# Altium PCB DRV8874.PcbDoc
Units mil, origin at the board's own origin, x right, y up, seen from the top; angles counter-clockwise.
Board outline 1080 x 1230 mil, 2 copper layers (Top Layer, Bottom Layer); 12 components, 14 nets, 39 pads, 0 vias.
Unrouted connection lines stored in the file: 5.
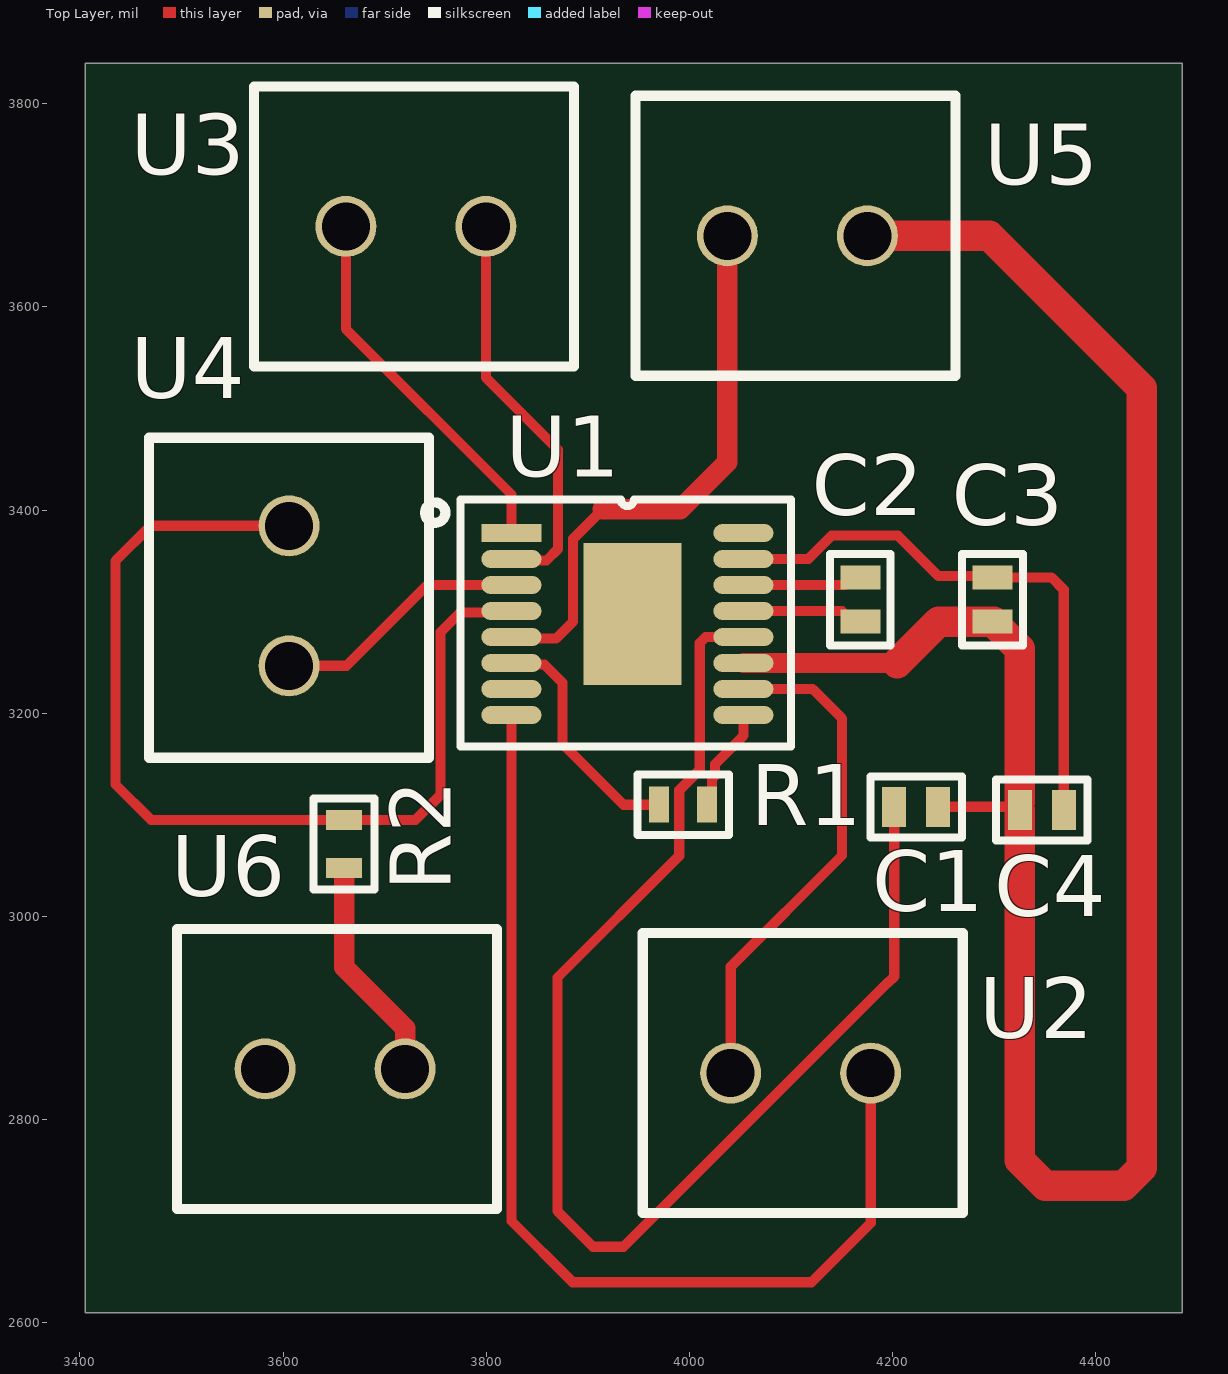
[diagram p0: Top Layer view]
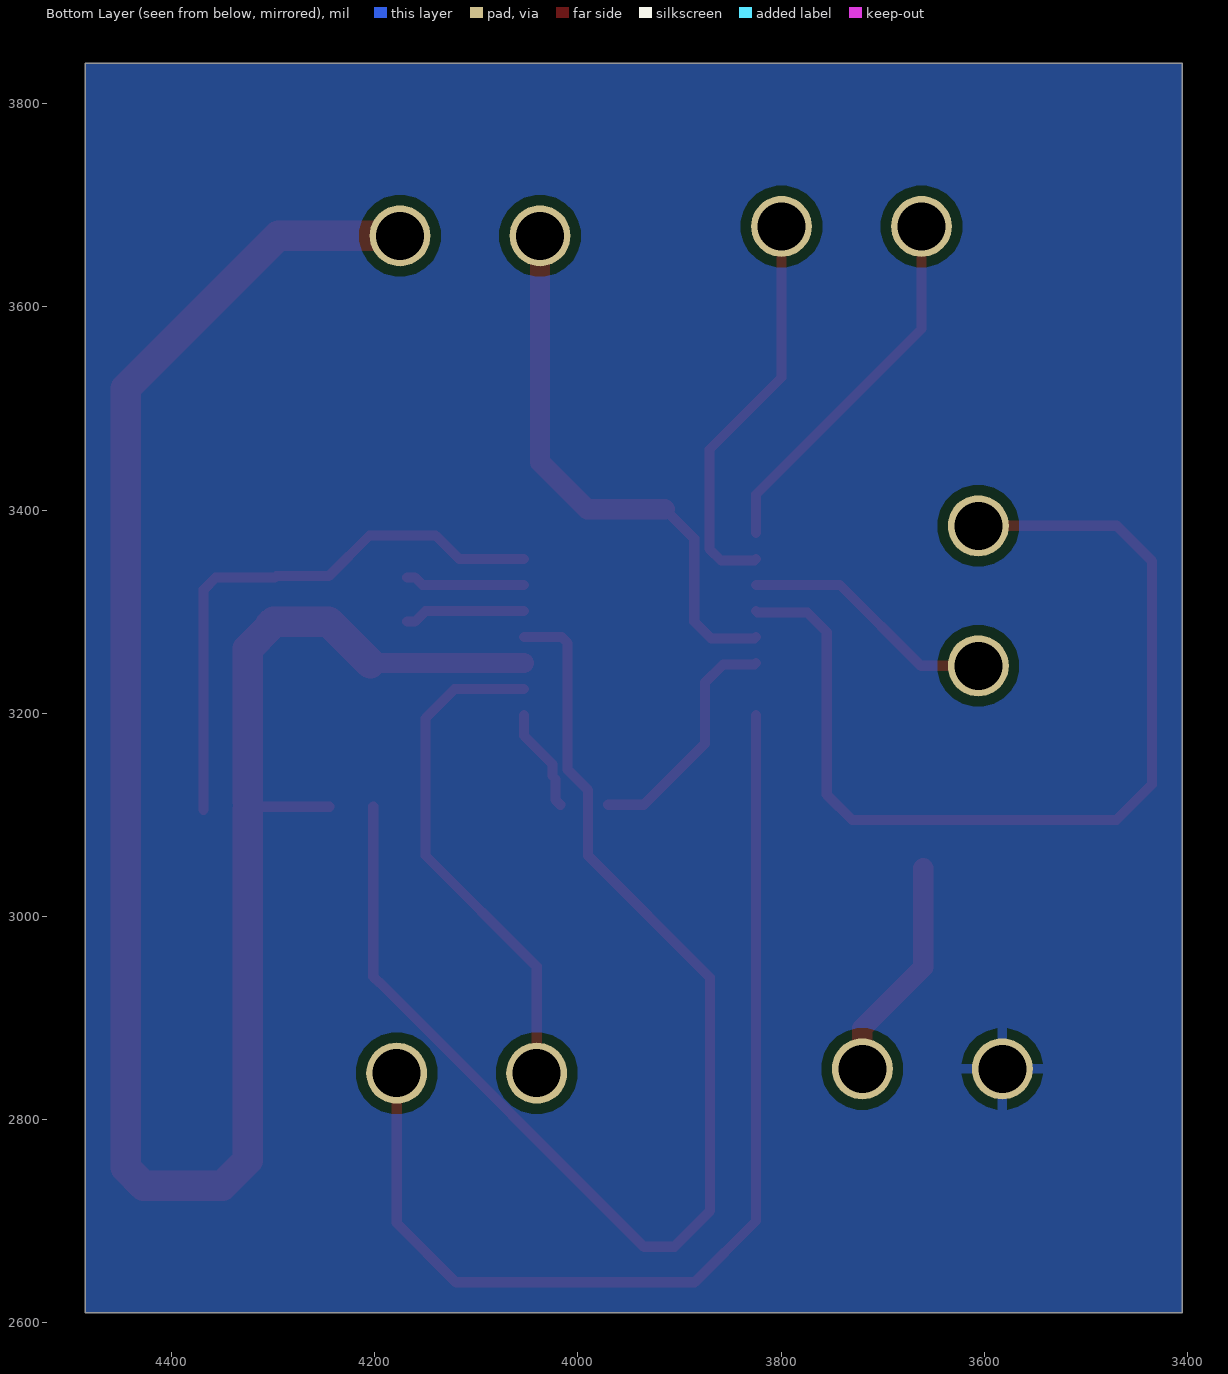
[diagram p1: Bottom Layer view, seen from below]

## Layer stack, top to bottom
Top Solder: solder mask 0.4, Solder Resist, Dk 3.5
Top Layer: signal copper 1.4
Dielectric 1: dielectric 12.6, FR-4, Dk 4.8
Bottom Layer: signal copper 1.4
Bottom Solder: solder mask 0.4, Solder Resist, Dk 3.5

## Board outline
3405,2610 4485,2610 4485,3840 3405,3840

## Design rules (kind name [scope] priority, off if disabled: settings)
Clearance [All] p1: gap=10 ignorepadtopadclearanceinfootprint=FALSE except(0: Arc-Hole Track-Hole SMDPad-Hole THPad-Hole Via-Hole Fill-Hole Poly-Hole Region-Hole Text-Hole; 5: Arc-Arc Arc-Track Arc-SMDPad Arc-THPad Arc-Via Track-Track Track-SMDPad Track-THPad Track-Via SMDPad-SMDPad SMDPad-THPad SMDPad-Via THPad-THPad THPad-Via Via-Via)
PolygonConnect [All] p1: connectstyle=Relief reliefconductorwidth=10 reliefentries=4 polygonreliefangle="90 Angle" airgapwidth=10
RoutingVias [All] p1: holewidth=28 width=50 viastyle="Through Hole" minholewidth=28 minwidth=50 maxholewidth=28 maxwidth=50
SolderMaskExpansion [All] p1: expansion=4 istentingtop=FALSE
Width Width_1 [All] p1: maxlimit=99999 minlimit=10 preferedwidth=10 minimp=50.000000 maximp=50.000000 favimp=50.000000
Width [All] p2: maxlimit=30 minlimit=5 preferedwidth=10 minimp=50.000000 maximp=50.000000 favimp=50.000000
30 further rules are at their usual default settings.

## Components (designator, comment, footprint, x,y, rotation, side; value= is the part's Value field where it differs from the comment)
C1 "Capacitor_100nF_0603" Capacitor_0603 4225,3105 r180 top
C2 "Capacitor_22nF_0603" Capacitor_0603 4165,3310 r90 top
C3 "Capacitor_100nF_0603" Capacitor_0603 4295,3310 r90 top
C4 "Capacitor_100nF_0603" Capacitor_0603 4348.62,3102.01 r180 top
R1 "Res_560m_0603" Res_10K_0603 3990.2,3103.86 r0 top
R2 "Res_10K_0603" Res_10K_0603 3666.14,3067.95 r90 top
U1 "DRV8874" DRV8874 3940,3290 r0 top
U2 "Terminal_Block" Terminal_Block 4110,2840 r0 top
U3 "Terminal_Block" Terminal_Block 3730,3685 r180 top
U4 "Terminal_Block" Terminal_Block 3600,3315 r270 top
U5 "Terminal_Block" Terminal_Block 4105.47,3675.83 r180 top
U6 "Terminal_Block" Terminal_Block 3651.73,2844.17 r0 top

## Footprints (in the part's own frame and the unit in brackets; to place one, negate y for a bottom-side part, rotate by r counter-clockwise, add the part's x,y. Pads: shape width x height; smd on the part's side, far side on the other; paste and mask are expansions set on the pad)
Capacitor_0603 [mm]
  rect 0.6x1 smd: 1(-0.5,-0.076) 2(0.6,-0.076)
  silkscreen extent -1.09,-0.84 1.19,0.69, body extent -0.71,-0.46 0.89,0.34, height 0.8
DRV8874 [mm]
  rect 1.5x0.45 smd mask+0.102: 1(-2.93,2.221)
  oval 1.5x0.45 smd: 2(-2.93,1.571) 3(-2.93,0.921) 4(-2.93,0.271) 5(-2.93,-0.379) 6(-2.93,-1.029) 7(-2.93,-1.679) 8(-2.93,-2.329) 9(2.87,-2.329) 10(2.87,-1.679) 11(2.87,-1.029) 12(2.87,-0.379) 13(2.87,0.271) 14(2.87,0.921) 15(2.87,1.571) 16(2.87,2.221)
  rect 2.46x3.55 smd: 17(0.097,0.2)
  silkscreen extent -5.09,-3.11 4.06,3.05, body extent -3.23,-2.55 3.17,2.45, height 1.2
Res_10K_0603 [mm]
  rect 0.5x0.9 smd: 1(-0.513,0.156) 2(0.687,0.156)
  silkscreen extent -1.06,-0.61 1.23,0.92, body extent -0.71,-0.27 0.89,0.59, height 0.48
Terminal_Block [mil]
  round 60 hole 47.24: 1(68.27,5.83) 2(-69.53,5.83)
  silkscreen extent -156,-132 159,144, body extent -152,-128 155,140, height 358

## Part data
U1: Manufacturer="Texas instruments", Supplier=LCSC

## Nets (pads, with @x,y where several pads share a name; then routed paths per layer and width w, separated by ;. In a path a pad name is that pad's centre, name@x,y a point inside that pad or via, vN(x,y) a via of type N, cw(c..) or ccw(c..) an arc to the next point about the centre after c; other vN are vias at no path point)
+3V3: R2.1 U6.1 | length 229.6
  Top Layer w10: R2.1@3655,3042.91 3659.84,3047.76 R2.1
  Top Layer w20: R2.1 3660,2950 3720,2890 U6.1
+5: U1.5 U5.1 | length 555.6
  Top Layer w10: U1.5 3826.12,3273.6 3868.6,3273.6 3885.39,3290.39 3885.39,3371.9 3914.44,3400.95
  Top Layer w20: 3914.44,3400.95 3990.95,3400.95 4037.2,3447.2 U5.1
+12: C1.1 C3.1 C4.2 U1.11 U5.2 | length 2132.9
  Top Layer w10: C1.1 C4.2@4322.01,3107.99 ; C4.2 C4.2@4325,3112.87 ; 4445,3300 4455,3290
  Top Layer w20: U1.11 4204.49,3249.49
  Top Layer w30: U5.2 4295,3670 4445,3520 4445,3300 4445,2752.57 4427.43,2735 4350,2735 4325,2760 C4.2 ; 4204.49,3249.49 4245.31,3290.32 C3.1 4299.49,3290.32 4302.68,3287.13 4302.68,3285.63 4325,3263.31 C4.2@4325,3112.87
Enable: U1.1 U3.1 | length 369.2
  Top Layer w10: U3.1 3661.73,3578.27 3824.65,3415.35 U1.1
GND: C3.2 C4.1 R1.2 U1.7 U1.9 U1.15 U1.16 U1.17 U6.2 | length 666.8
  Top Layer w10: R1.2 4022.09,3114.84 4022.09,3135.33 4025,3138.24 4025,3150 4052.99,3177.99 U1.9 ; U1.15 4116.85,3351.85 4140,3375 4205,3375 4245,3335 4296.61,3335 C3.2 4356.38,3333.62 4368.31,3321.69 C4.1
NetC1_2: C1.2 U1.12 | length 1285.8
  Top Layer w10: U1.12 4015.86,3275.08 4010,3269.22 4010,3144.46 3989.84,3124.3 3989.84,3059.84 3870,2940 3870,2710 3905,2675 3935,2675 4195,2935 4195.52,2935 4201.38,2940.86 C1.2
NetC2_1: C2.1 U1.13 | length 119.3
  Top Layer w10: U1.13 4149.76,3300.67 4160.12,3290.32 C2.1
NetC2_2: C2.2 U1.14 | length 118
  Top Layer w10: U1.14 4152.76,3326.26 4160.12,3333.62 C2.2
NetR1_1: R1.1 U1.6 | length 238.3
  Top Layer w10: U1.6 3826.12,3248.01 3856.99,3248.01 3874.97,3230.03 3874.97,3170.03 3935,3110 R1.1
NetU1_8: U1.8 U2.1 | length 1048.3
  Top Layer w10: U1.8 3824.65,2700.35 3885,2640 4120,2640 4178.27,2698.27 U2.1
NetU1_10: U1.10 U2.2 | length 503.5
  Top Layer w10: U2.2 4040.47,2950.47 4150,3060 4150,3195 4121.1,3223.9 U1.10
nFAULT: R2.2 U1.4 U4.2 | length 988.2
  Top Layer w10: U4.2 3469.53,3384.53 3435,3350 3435,3130 3470,3095 R2.2 3730,3095 3755,3120 3755,3280 3774.19,3299.19 3823.17,3299.19 U1.4
nSLEEP: U1.3 U4.1 | length 251.8
  Top Layer w10: U4.1 3662.36,3246.73 3741.89,3326.26 U1.3
PH/IN2: U1.2 U3.2 | length 397.9
  Top Layer w10: U3.2 3799.53,3530.47 3870.39,3459.61 3870.39,3361.63 3859.14,3350.37 3826.12,3350.37 U1.2

## Polygon pours and split planes (outlines as drawn)
GND on Bottom Layer "GND_L02_P000" (solid, pour order 0): 3405,2610 4485,2610 4485,3840 3405,3840